# Altium PCB hades_flight_controller_pcb.PcbDoc (part 1 of 2)
Units mm, origin at the board's own origin, x right, y up, seen from the top; angles counter-clockwise.
Board outline 60 x 80 mm, 2 copper layers (Top Layer, Bottom Layer), stack 1.67 mm thick; 73 components, 57 nets, 348 pads, 115 vias.
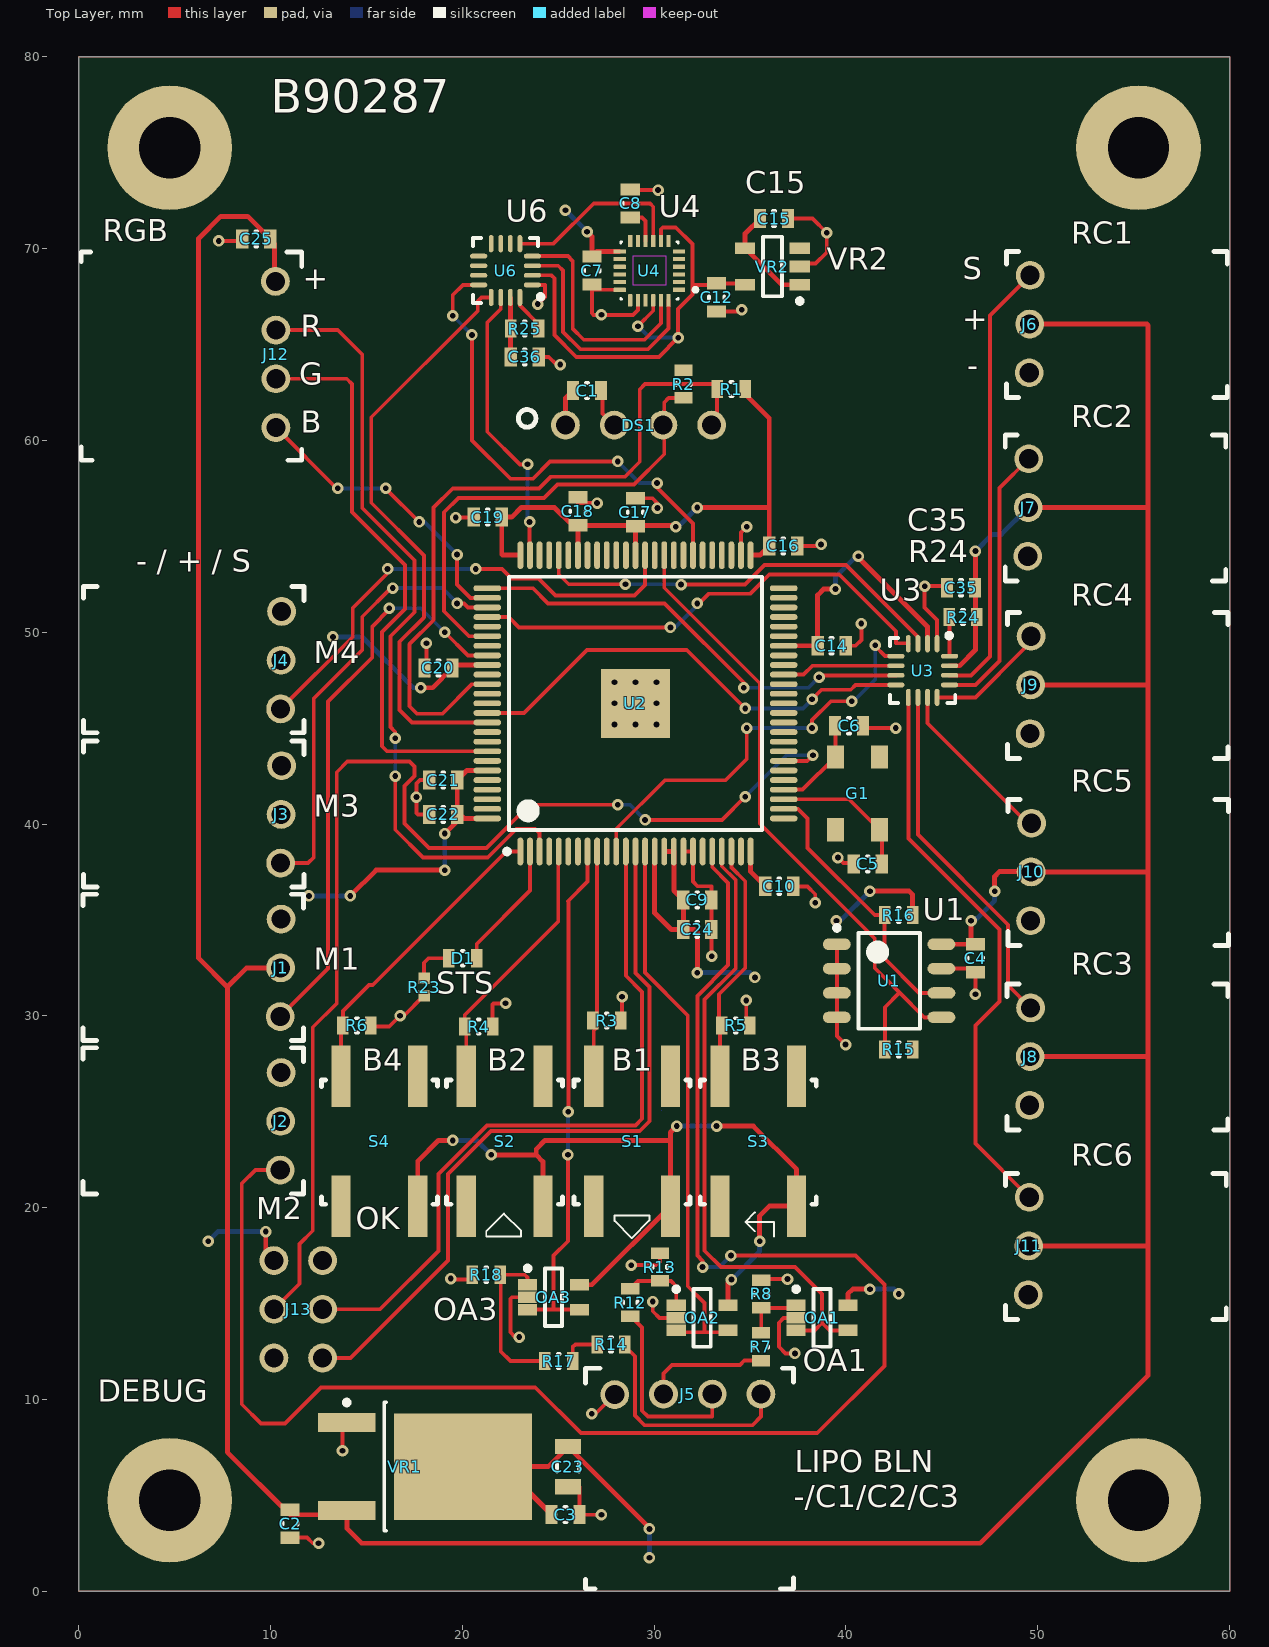
[diagram p0: Top Layer view]
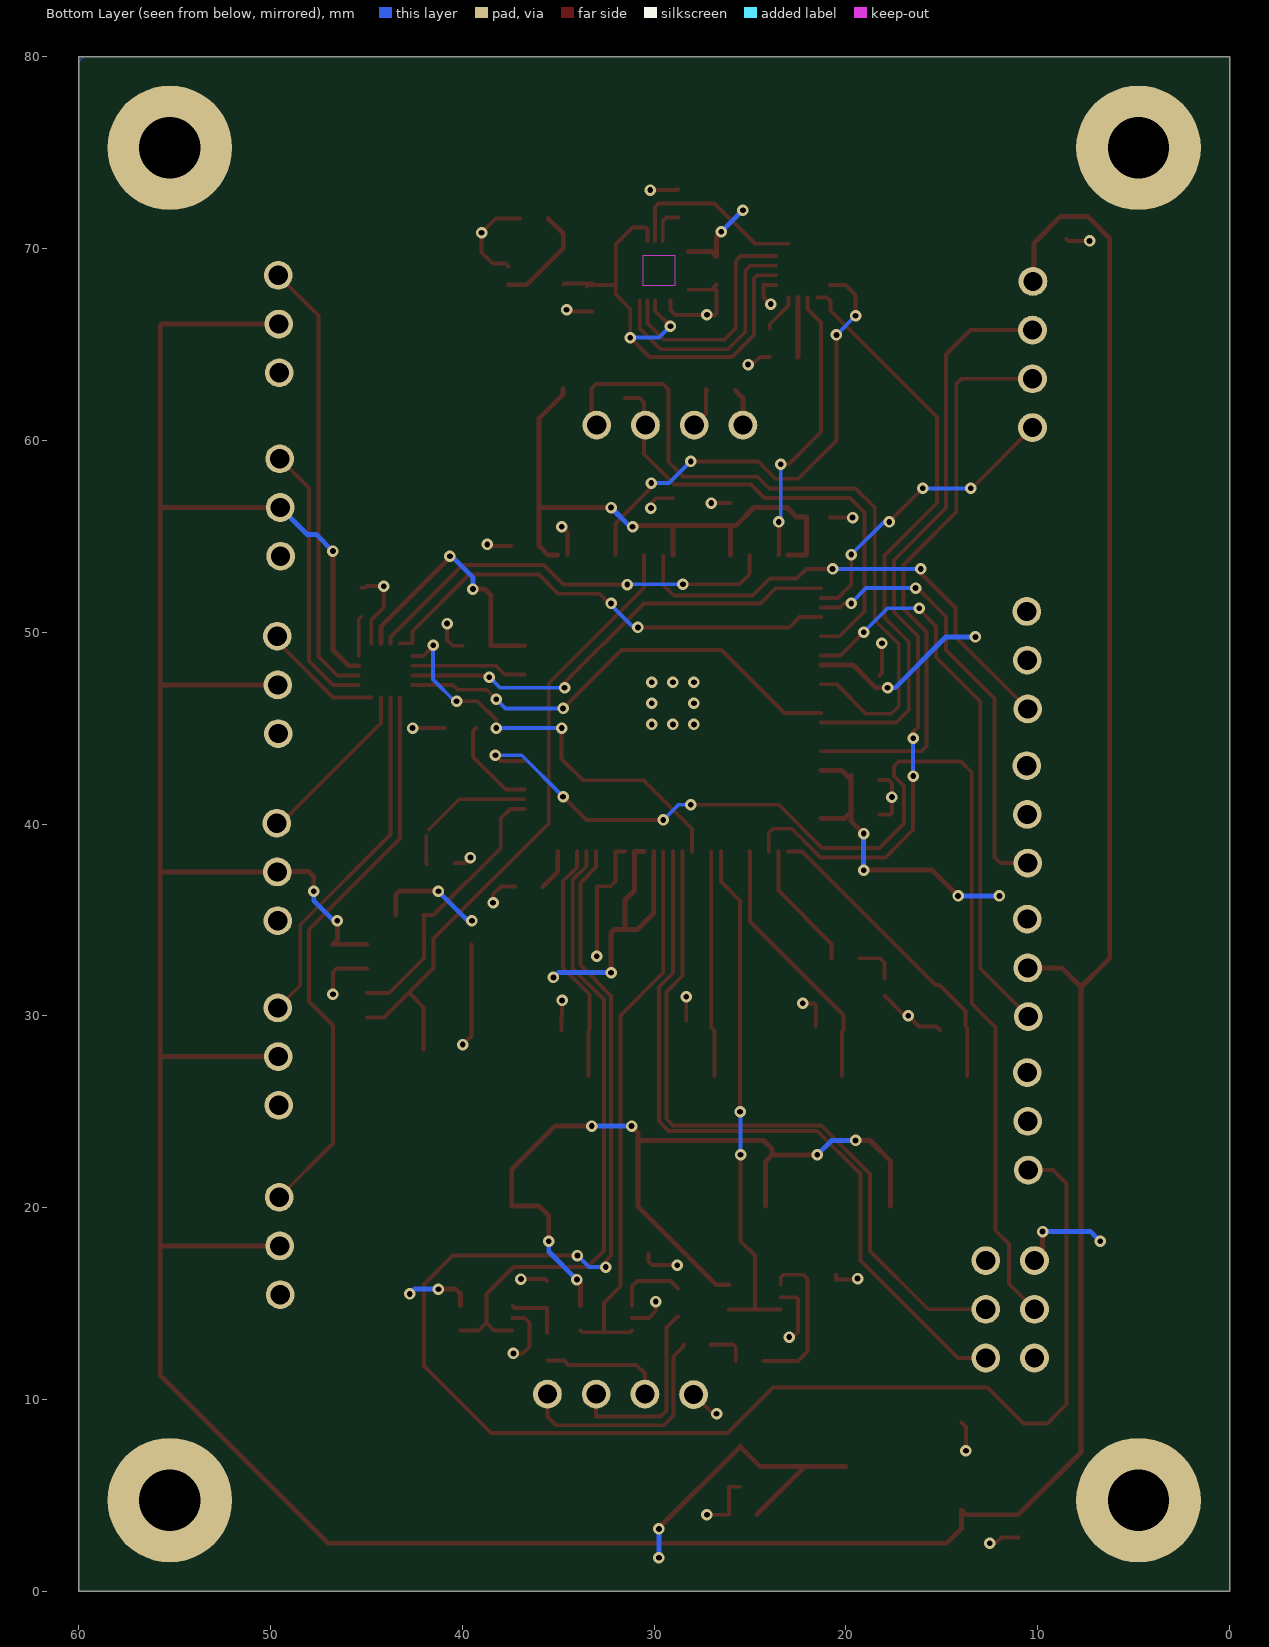
[diagram p1: Bottom Layer view, seen from below]

## Layer stack, top to bottom
Top Solder: solder mask 0.0102, Solder Resist, Dk 3.5
Top Layer: signal copper 0.053
Dielectric 1: dielectric 1.564, FR-4, Dk 4.8
Bottom Layer: signal copper 0.053
Bottom Solder: solder mask 0.0102, Solder Resist, Dk 3.5

## Board outline
0,80 0,0 60,0 60,80

## Design rules (kind name [scope] priority, off if disabled: settings)
AcuteAngle [All] p1: minimum=6.00000000000000E+0001 checktracksonly=FALSE
BoardOutlineClearance [All] p1: gap=0.254 ignorepadtopadclearanceinfootprint=FALSE except(0: Arc-SplitContinuation Track-SplitContinuation SMDPad-SplitContinuation THPad-SplitContinuation Via-SplitContinuation Fill-SplitContinuation Poly-SplitContinuation Region-SplitContinuation Text-SplitContinuation; 0.2: Arc-OutlineEdge Track-OutlineEdge SMDPad-OutlineEdge THPad-OutlineEdge Via-OutlineEdge Fill-OutlineEdge Poly-OutlineEdge Region-OutlineEdge)
Clearance [All] p1: gap=0.2 ignorepadtopadclearanceinfootprint=TRUE
MinimumSolderMaskSliver [All] p1: minsoldermaskwidth=0.12
PolygonConnect [All] p1: connectstyle=Relief reliefconductorwidth=0.254 reliefentries=4 polygonreliefangle="90 Angle" airgapwidth=0.254
RoomDefinition nelikkopteri_lennukontroller_riistvaraprojekt_sygis [InComponentClass('nelikkopteri_lennukontroller_riistvaraprojekt_sygis')] p1 off: confinementstyle=ConfineIn formatcopy=TRUE lockcomponents=FALSE outline 273,120.575 324.5,120.575 324.5,132 273,132
RoutingVias [All] p1: holewidth=0.3 width=0.6 viastyle="Through Hole" minholewidth=0.3 minwidth=0.6 maxholewidth=0.3 maxwidth=0.6
SolderMaskExpansion [All] p1: expansion=0.05
Width [All] p1: maxlimit=0.254 minlimit=0.2 preferedwidth=0.2
29 further rules are at their usual default settings.

## Components (designator, comment, footprint, x,y, rotation, side; value= is the part's Value field where it differs from the comment)
C1 "1uF" "0603 - cap" 26.5,62.6 r0 top
C2 "1uF" "0603 - cap" 11.015,3.525 r270 top
C3 "1uF" "0603 - cap" 25.375,4 r0 top
C4 "0.1uF" "0603 - cap" 46.75,33 r270 top
C5 "22pF" "0603 - cap" 41.13,37.92 r0 top
C6 "22pF" "0603 - cap" 40.16,45.12 r180 top
C7 "0.1uF" "0603 - cap" 26.75,68.855 r270 top
C8 "0.1uF" "0603 - cap" 28.75,72.355 r90 top
C9 "0.1uF" "0603 - cap" 32.25,36.04 r0 top
C10 "0.1uF" "0603 - cap" 36.52,36.75 r0 top
C12 "1uF" "0603 - cap" 33.25,67.455 r270 top
C14 "0.1uF" "0603 - cap" 39.25,49.29 r0 top
C15 "1uF" "0603 - cap" 36.25,71.565 r0 top
C16 "0.1uF" "0603 - cap" 36.73,54.5 r0 top
C17 "0.1uF" "0603 - cap" 29.025,56.25 r90 top
C18 "0.1uF" "0603 - cap" 26.025,56.3 r90 top
C19 "0.1uF" "0603 - cap" 21.325,56 r180 top
C20 "0.1uF" "0603 - cap" 18.75,48.14 r180 top
C21 "0.1uF" "0603 - cap" 19,42.29 r180 top
C22 "0.1uF" "0603 - cap" 19,40.5 r180 top
C23 "4.7uF" "0805 - cap" 25.5,6.5 r270 top
C24 "0.1uF" "0603 - cap" 32.25,34.5 r0 top
C25 "0.1uF" "0603 - cap" 9.25,70.5 r180 top
C35 "0.1uF" "0603 - cap" 46,52.315 r180 top
C36 "0.1uF" "0603 - cap" 23.25,64.355 r0 top
D1 "KP-1608QBC-D" "0603 - resistor" 20.025,33 r180 top
DS1 "MDOB048064AV-WI" oled-display 25.525,60.67 r0 top locked
G1 "LFXTAL055901" kristall 40.75,41.5 r270 top
J1 "292253-3 (motor)" "3-pin connector" 10.55,34.29 r270 top
J2 "292253-3 (motor)" "3-pin connector" 10.55,26.29 r270 top
J3 "292253-3 (motor)" "3-pin connector" 10.575,42.29 r270 top
J4 "292253-3 (motor)" "3-pin connector" 10.575,50.33 r270 top
J5 "292161-4 (balance)" "4-pin connector" 30.045,10.277 r0 top
J6 "292253-3 (RC)" "3-pin connector" 49.55,64.275 r90 top
J7 "292253-3 (RC)" "3-pin connector" 49.475,54.71 r90 top
J8 "292253-3 (RC)" "3-pin connector" 49.575,26.085 r90 top
J9 "292253-3 (RC)" "3-pin connector" 49.6,45.46 r90 top
J10 "292253-3 (RC)" "3-pin connector" 49.625,35.71 r90 top
J11 "292253-3 (RC)" "3-pin connector" 49.5,16.21 r90 top
J12 "292161-4 (led driver)" "4-pin connector" 10.277,66.19 r270 top
J13 "292161-4" "6-PIN CONNECTOR" 12.712,16.09 r270 top
OA1 "MIC920YC5-TR" (OPAMP)SOT65P280X110-5N 38.75,14.25 r0 top
OA2 "MIC920YC5-TR" (OPAMP)SOT65P280X110-5N 32.5,14.25 r0 top
OA3 "MIC920YC5-TR" (OPAMP)SOT65P280X110-5N 24.75,15.33 r0 top
R1 "2.2K" "0603 - resistor" 34.025,62.675 r180 top
R2 "2.2K" "0603 - resistor" 31.525,62.935 r270 top
R3 "1K" "0603 - resistor" 27.525,29.75 r0 top
R4 "1K" "0603 - resistor" 20.85,29.44 r0 top
R5 "1K" "0603 - resistor" 34.25,29.5 r0 top
R6 "1K" "0603 - resistor" 14.5,29.5 r0 top
R7 "100k" "0603 - resistor" 35.565,12.75 r90 top
R8 "100k" "0603 - resistor" 35.58,15.5 r90 top
R12 "200K" "0603 - resistor" 28.75,15.05 r270 top
R13 "100k" "0603 - resistor" 30.3,16.9 r90 top
R14 "200K" "0603 - resistor" 27.75,12.87 r0 top
R15 "2.2K" "0603 - resistor" 42.75,28.25 r180 top
R16 "2.2K" "0603 - resistor" 42.75,35.25 r180 top
R17 "200K" "0603 - resistor" 25.025,12 r0 top
R18 "100k" "0603 - resistor" 21.25,16.5 r180 top
R23 "50" "0402 - resistor" 18,31.5 r270 top
R24 "200K" "0603 - resistor" 46.1,50.79 r180 top
R25 "200K" "0603 - resistor" 23.25,65.83 r0 top
S1 "EVQ-Q2D03W" button 28.775,23.5 r90 top
S2 "EVQ-Q2D03W" button 22.125,23.5 r90 top
S3 "EVQ-Q2D03W" button 35.35,23.5 r90 top
S4 "EVQ-Q2D03W" button 15.6,23.5 r90 top
U1 "24C02C/SN" (EEPROM)SOIC127P600X175-8N 42.25,31.825 r0 top
U2 "LPC5512JBD100E" TSQFP50P1600X1600X160_HS-101N 29.025,46.29 r90 top
U3 "NVT2006BS,118" "QFN5(SHIFTER) 0P300X300X100_HS-17N" 44,48 r270 top
U4 "ICM-20948" QFN40P300X300X105-24N 29.75,68.85 r180 top
U6 "NVT2006BS,118" "QFN5(SHIFTER) 0P300X300X100_HS-17N" 22.25,68.855 r180 top
VR1 "TLV1117-33CKVURG3" DPAK229P991X252-3N 18.075,6.5 r0 top
VR2 "MCP1804T-1802I/OT" "(LDO 1.8)SOT95P270X145-5N" 36.165,69.065 r180 top

## Footprints (in the part's own frame and the unit in brackets; to place one, negate y for a bottom-side part, rotate by r counter-clockwise, add the part's x,y. Pads: shape width x height; smd on the part's side, far side on the other; paste and mask are expansions set on the pad)
"3-pin connector" [mm]
  round 1.5 hole 1: 1(-0.75,0) 2(1.79,-0.025) 3(4.33,-0.05)
  silkscreen extent -2.04,-10.33 5.58,1.17, body extent -1.9,-10.2 5.45,-1, height 3
"4-pin connector" [mm]
  round 1.5 hole 1: 1(-2.1,-0.025) 2(0.44,0) 3(2.98,0) 4(5.52,0)
  silkscreen extent -3.62,-10.15 7.22,1.35, body extent -3.47,-10.07 7.1,-0.87, height 3
"6-PIN CONNECTOR" [mm]
  round 1.5 hole 1: 1(-1.15,0) 2(1.39,0) 3(3.93,0) 4(-1.15,-2.54) 5(1.39,-2.54) 6(3.93,-2.54)
  body extent -2.45,-12.71 5.15,-3.74, height 1.27
"0402 - resistor" [mm] "Chip Resistor, 2-Leads, Body 1,00x0,50mm, IPC Medium Density"
  rect 0.6x0.6 smd mask+0.06: 1(-0.45,0) 2(0.45,0)
  body extent -0.55,-0.3 0.55,0.3, height 0.4
"0603 - cap" [mm] "Chip Capacitor, 2-Leads, Body 1,55x0,85mm, IPC Medium Density"
  rect 0.64x1 smd: 1(-0.73,0) 2(0.73,0)
  silkscreen extent -0.05,-0.4 0.05,0.4, body extent -0.83,-0.48 0.82,0.47, height 0.45
"0603 - resistor" [mm] "Chip Resistor, 2-Leads, Body 1,55x0,85mm, IPC Medium Density"
  rect 0.6x0.95 smd: 1(-0.725,0) 2(0.725,0)
  silkscreen extent -0.05,-0.38 0.05,0.38, body extent -0.82,-0.48 0.82,0.48, height 0.45
"0805 - cap" [mm] "Chip Capacitor, 2-Leads, Body 2,00x1,20mm, IPC Medium Density"
  rect 0.8x1.35 smd: 1(-1.05,0) 2(1.05,0)
  silkscreen extent -0.25,-0.58 0.25,0.58, body extent -1.05,-0.65 1.05,0.65, height 0.3
(EEPROM)SOIC127P600X175-8N [mm] "SOIC, 8-Leads, Body 4,90x3,90mm, Pitch 1,27mm, IPC Medium Density"
  oval 1.45x0.6 smd: 1(-2.725,1.905) 2(-2.725,0.635) 3(-2.725,-0.635) 4(-2.725,-1.905) 5(2.725,-1.905) 6(2.725,-0.635) 7(2.725,0.635) 8(2.725,1.905)
  silkscreen extent -2.85,-2.5 1.6,2.88, body extent -2,-2.5 2,2.5, height 1.75
"(LDO 1.8)SOT95P270X145-5N" [mm] "SOT23, 5-Leads, Body 2,90x2,70mm, Pitch 0,95mm, IPC Medium Density"
  rect 1.05x0.6 smd: 1(-1.425,0.95) 2(-1.425,0) 3(-1.425,-0.95) 4(1.425,-0.95) 5(1.425,0.95)
  silkscreen extent -1.55,-1.55 0.5,1.92, body extent -0.9,-1.55 0.9,1.55, height 1.45
(OPAMP)SOT65P280X110-5N [mm] "SOT23, 5-Leads, Body 2,90x2,80mm, Pitch 0,65mm, IPC Medium Density"
  rect 1x0.6 smd: 1(-1.35,0.65) 2(-1.35,0) 3(-1.35,-0.65) 4(1.35,-0.65) 5(1.35,0.65)
  silkscreen extent -1.47,-1.5 0.45,1.62, body extent -0.85,-1.5 0.85,1.5, height 1.1
button [mm]
  rect 3.2x1 smd: 1(-3.425,-2.075) 2(-3.425,1.925) 3(3.35,-2.075) 4(3.35,1.925)
  silkscreen extent -3.33,-3.1 3.15,2.95, body extent -3.4,-3.2 3.2,3.03, height 1.3
DPAK229P991X252-3N [mm] "D-PAK, 3-Pads, Body 6,20x6,71mm (max), IPC Medium Density"
  rect 3x1 smd: 1(-4.1,2.29) 3(-4.1,-2.29)
  rect 7.2x5.55 smd: 2(1.95,0)
  silkscreen extent -4.22,-3.35 -2.05,3.46, body extent -2.15,-3.35 4.05,3.35, height 2.52
kristall [mm]
  rect 1.2x0.9 smd: 1(-2,1) 2(1.8,-1.3) 3(-2,-1.3) 4(1.8,1)
  body extent -2.7,-1.85 2.5,1.55, height 0.45
oled-display [mm]
  round 1.5 hole 1: 1(-0.15,0.125) 2(2.39,0.125) 3(4.93,0.125) 4(7.47,0.125)
  silkscreen extent -2.61,0.02 -0.15,0.93, body extent -4.23,-25.3 11.48,-1.05, height 3.5
"QFN5(SHIFTER) 0P300X300X100_HS-17N" [mm] "QFN, 16-Leads, Body 3,00x3,00mm, Pitch 0,50mm, Thermal Pad 1,50x1,50mm, IPC Medium Density"
  oval 0.9x0.25 smd mask+0.13: 1(-1.4,0.75) 2(-1.4,0.25) 3(-1.4,-0.25) 4(-1.4,-0.75) 9(1.4,-0.75) 10(1.4,-0.25) 11(1.4,0.25) 12(1.4,0.75)
  oval 0.25x0.9 smd mask+0.13: 5(-0.75,-1.4) 6(-0.25,-1.4) 7(0.25,-1.4) 8(0.75,-1.4) 13(0.75,1.4) 14(0.25,1.4) 15(-0.25,1.4) 16(-0.75,1.4)
  silkscreen extent -1.95,-1.7 1.7,1.7, body extent -1.55,-1.55 1.55,1.55, height 1
QFN40P300X300X105-24N [mm]
  rrect25% 0.64x0.22 smd: 1(-1.545,1) 2(-1.545,0.6) 3(-1.545,0.2) 4(-1.545,-0.2) 5(-1.545,-0.6) 6(-1.545,-1) 13(1.545,-1) 14(1.545,-0.6) 15(1.545,-0.2) 16(1.545,0.2) 17(1.545,0.6) 18(1.545,1)
  rrect25% 0.22x0.64 smd: 7(-1,-1.545) 8(-0.6,-1.545) 9(-0.2,-1.545) 10(0.2,-1.545) 11(0.6,-1.545) 12(1,-1.545) 19(1,1.545) 20(0.6,1.545) 21(0.2,1.545) 22(-0.2,1.545) 23(-0.6,1.545) 24(-1,1.545)
  Keep-Out Layer region: 0.85,-0.77 -0.85,-0.77 -0.85,0.77 0.85,0.77
  Keep-Out Layer region: 0.85,-0.77 -0.85,-0.77 -0.85,0.77 0.85,0.77
  silkscreen extent -2.5,-1.5 1.5,1.5, body extent -1.5,-1.5 1.5,1.5, height 1
TSQFP50P1600X1600X160_HS-101N [mm] "TSQFP, 100-Leads, Body 14,00x14,00mm, Pitch 0,50mm, Thermal Pad 3,61x3,61mm, IPC Medium Density"
  oval 1.45x0.3 smd: 1(-7.725,6) 2(-7.725,5.5) 3(-7.725,5) 4(-7.725,4.5) 5(-7.725,4) 6(-7.725,3.5) 7(-7.725,3) 8(-7.725,2.5) 9(-7.725,2) 10(-7.725,1.5) 11(-7.725,1) 12(-7.725,0.5) 13(-7.725,0) 14(-7.725,-0.5) 15(-7.725,-1) 16(-7.725,-1.5) 17(-7.725,-2) 18(-7.725,-2.5) 19(-7.725,-3) 20(-7.725,-3.5) 21(-7.725,-4) 22(-7.725,-4.5) 23(-7.725,-5) 24(-7.725,-5.5) 25(-7.725,-6) 51(7.725,-6) 52(7.725,-5.5) 53(7.725,-5) 54(7.725,-4.5) 55(7.725,-4) 56(7.725,-3.5) 57(7.725,-3) 58(7.725,-2.5) 59(7.725,-2) 60(7.725,-1.5) 61(7.725,-1) 62(7.725,-0.5) 63(7.725,0) 64(7.725,0.5) 65(7.725,1) 66(7.725,1.5) 67(7.725,2) 68(7.725,2.5) 69(7.725,3) 70(7.725,3.5) 71(7.725,4) 72(7.725,4.5) 73(7.725,5) 74(7.725,5.5) 75(7.725,6)
  oval 0.3x1.45 smd: 26(-6,-7.725) 27(-5.5,-7.725) 28(-5,-7.725) 29(-4.5,-7.725) 30(-4,-7.725) 31(-3.5,-7.725) 32(-3,-7.725) 33(-2.5,-7.725) 34(-2,-7.725) 35(-1.5,-7.725) 36(-1,-7.725) 37(-0.5,-7.725) 38(0,-7.725) 39(0.5,-7.725) 40(1,-7.725) 41(1.5,-7.725) 42(2,-7.725) 43(2.5,-7.725) 44(3,-7.725) 45(3.5,-7.725) 46(4,-7.725) 47(4.5,-7.725) 48(5,-7.725) 49(5.5,-7.725) 50(6,-7.725) 76(6,7.725) 77(5.5,7.725) 78(5,7.725) 79(4.5,7.725) 80(4,7.725) 81(3.5,7.725) 82(3,7.725) 83(2.5,7.725) 84(2,7.725) 85(1.5,7.725) 86(1,7.725) 87(0.5,7.725) 88(0,7.725) 89(-0.5,7.725) 90(-1,7.725) 91(-1.5,7.725) 92(-2,7.725) 93(-2.5,7.725) 94(-3,7.725) 95(-3.5,7.725) 96(-4,7.725) 97(-4.5,7.725) 98(-5,7.725) 99(-5.5,7.725) 100(-6,7.725)
  rect 3.6x3.6 smd: 52(0,0)
  silkscreen extent -7.85,-6.6 6.6,6.82, body extent -7,-7 7,7, height 1.6

## Part data
C1 C2 C3 C12 C15: library part "1uF cap", "Multilayer Ceramic Capacitors MLCC - SMD/SMT 0402 1.0uF 6.3volts *Derate Voltage/Temp", Case/Package=0402, Case Code (Metric)=1005, Dielectric=X7R, Manufacturer=Murata, Manufacturer Part Number=GRM155R70J105KA12D, Max Operating Temperature=125°C, Min Operating Temperature=-55°C, Package Quantity=10000, Supplier Part Number 1=2346895, Tolerance=10%, Voltage Rating=6.3V, Capacitance=1uF, Case Code (Imperial)=0402, ComponentLink1Description=http://www.farnell.com/datasheets/2189111.pdf?src-supplier=Newark, ComponentLink1URL=http://www.farnell.com/datasheets/2189111.pdf?src-supplier=Newark, ComponentLink2Description=http://www.farnell.com/datasheets/2189111.pdf?src-supplier=Farnell, ComponentLink2URL=http://www.farnell.com/datasheets/2189111.pdf?src-supplier=Farnell, ComponentLink3Description=https://search.murata.co.jp/Ceramy/image/img/A01X/G101/ENG/GRM155R70J105KA12-01.pdf?src-supplier=Digi-Key, ComponentLink3URL=https://search.murata.co.jp/Ceramy/image/img/A01X/G101/ENG/GRM155R70J105KA12-01.pdf?src-supplier=Digi-Key, ComponentLink4Description=http://www.mouser.com/ds/2/281/c02e-2905.pdf?src-supplier=Mouser, ComponentLink4URL=http://www.mouser.com/ds/2/281/c02e-2905.pdf?src-supplier=Mouser, ComponentLink5Description=http://psearch.en.murata.com/capacitor/product/GRM155R70J105KA12%23.pdf?src-supplier=Avnet, ComponentLink5URL=http://psearch.en.murata.com/capacitor/product/GRM155R70J105KA12%23.pdf?src-supplier=Avnet, ComponentLink6Description=http://components.arrow.com/part/dataview/0323_06434986?src-supplier=Arrow+Europe, ComponentLink6URL=http://components.arrow.com/part/dataview/0323_06434986?src-supplier=Arrow+Europe, Depth=0.5mm, Height=0.5mm, Lead Free="Lead Free", Length=1mm, Material=Ceramic, Mount="Surface Mount", Packaging="Tape and Reel", RoHS Compliant=Yes, Supplier 1=Farnell, Termination=SMD/SMT, Thickness=0.022inch, Voltage Rating (DC)=6.3V, Weight=0.000212oz, Width=0.5mm
C4 C7 C8 C9 C10 C14 C16 C17 C18 C19 C20 C21 C22 C24 C25 C35 C36: library part "0.1uF cap", "Cap, 0.1?F, 10V, 10%, X7R, 0603, Reel", Capacitance=100nF, Case Code (Imperial)=0603, Case Code (Metric)=1608, Dielectric=X7R, Manufacturer=Multicomp, Manufacturer Part Number=MC0603B104K100CT, Max Operating Temperature=125°C, Min Operating Temperature=-55°C, Supplier Part Number 1=1856307, Tolerance=10%, Voltage Rating=10V, ComponentLink1Description=http://www.farnell.com/datasheets/2117900.pdf?src-supplier=Element14, ComponentLink1URL=http://www.farnell.com/datasheets/2117900.pdf?src-supplier=Element14, ComponentLink2Description=http://www.farnell.com/datasheets/2117933.pdf?src-supplier=Farnell, ComponentLink2URL=http://www.farnell.com/datasheets/2117933.pdf?src-supplier=Farnell, ComponentLink3Description=http://www.farnell.com/datasheets/2117933.pdf?src-supplier=Element14, ComponentLink3URL=http://www.farnell.com/datasheets/2117933.pdf?src-supplier=Element14, Packaging="Cut Tape", REACH SVHC="No SVHC", Supplier 1=Farnell, Voltage Rating (DC)=10V
C5 C6: library part "22pF cap", "0402 22 pF 50 V ±5 % Tolerance C0G SMT Multilayer Ceramic Capacitor", Case/Package=0402, Case Code (Metric)=1005, Dielectric=C0G, Manufacturer=Murata, Manufacturer Part Number=GCM1555C1H220JA16D, Max Operating Temperature=125°C, Min Operating Temperature=-55°C, Package Quantity=1, Ratings=AEC-Q200, Supplier Part Number 1=2781410, Tolerance=5%, Voltage Rating=50V, Capacitance=22pF, Case Code (Imperial)=0402, ComponentLink1Description=http://www.farnell.com/datasheets/2189077.pdf?src-supplier=Farnell, ComponentLink1URL=http://www.farnell.com/datasheets/2189077.pdf?src-supplier=Farnell, ComponentLink2Description=http://www.farnell.com/datasheets/2189077.pdf?src-supplier=Element14, ComponentLink2URL=http://www.farnell.com/datasheets/2189077.pdf?src-supplier=Element14, ComponentLink3Description=http://search.murata.co.jp/Ceramy/image/img/A01X/partnumbering_e_02.pdf?src-supplier=Digi-Key, ComponentLink3URL=http://search.murata.co.jp/Ceramy/image/img/A01X/partnumbering_e_02.pdf?src-supplier=Digi-Key, ComponentLink4Description=http://www.mouser.com/ds/2/281/c03e-806517.pdf?src-supplier=Mouser, ComponentLink4URL=http://www.mouser.com/ds/2/281/c03e-806517.pdf?src-supplier=Mouser, ComponentLink5Description=http://psearch.en.murata.com/capacitor/product/GCM1555C1H220JA16%23.pdf?src-supplier=Avnet, ComponentLink5URL=http://psearch.en.murata.com/capacitor/product/GCM1555C1H220JA16%23.pdf?src-supplier=Avnet, ComponentLink6Description=http://components.arrow.com/part/dataview/0323_07199610?src-supplier=Arrow+Europe, ComponentLink6URL=http://components.arrow.com/part/dataview/0323_07199610?src-supplier=Arrow+Europe, Depth=0.5mm, Height=0.5mm, Lead Free="Lead Free", Length=1mm, Mount="Surface Mount", Packaging="Tape and Reel", RoHS Compliant=Yes, Supplier 1=Farnell, Termination=SMD/SMT, Thickness=0.022inch, Voltage Rating (DC)=50V, Weight=0.000212oz, Width=0.5mm
C23: library part "4.7uF cap", "0805 4.7 uF 50 V ±10% Tolerance X5R SMT Multilayer Ceramic Chip Capacitor", Case/Package=0805, Case Code (Metric)=2012, Dielectric=X5R, Manufacturer=Murata, Manufacturer Part Number=GRT21BR61H475KE13L, Max Operating Temperature=85°C, Min Operating Temperature=-55°C, Ratings=AEC-Q200, Supplier Part Number 1=2672194, Tolerance=10%, Voltage Rating=50V, Capacitance=4.7uF, Case Code (Imperial)=0805, ComponentLink1Description=http://www.farnell.com/datasheets/2165993.pdf?src-supplier=Farnell, ComponentLink1URL=http://www.farnell.com/datasheets/2165993.pdf?src-supplier=Farnell, ComponentLink2Description=http://www.farnell.com/datasheets/2165993.pdf?src-supplier=Element14, ComponentLink2URL=http://www.farnell.com/datasheets/2165993.pdf?src-supplier=Element14, ComponentLink3Description=http://search.murata.co.jp/Ceramy/image/img/A01X/G101/ENG/GRT21BR61H475KE13-01.pdf?src-supplier=Digi-Key, ComponentLink3URL=http://search.murata.co.jp/Ceramy/image/img/A01X/G101/ENG/GRT21BR61H475KE13-01.pdf?src-supplier=Digi-Key, Length=0.079inch, Mount="Surface Mount", Packaging="Tape and Reel", Pricing 1="5=0.38, 50=0.194, 250=0.174, 500=0.154, 1500=0.128, 3000=0.1, 15000=0.098 (EUR)", RoHS Compliant=Yes, Stock 1=51693, Supplier 1=Farnell, Thickness=0.057inch, Voltage Rating (DC)=50V, Width=0.049inch
D1: "LED Uni-Color Blue 468nm 2-Pin Chip LED T/R", Case/Package=1608, Color=Blue, Forward Current=20mA, Forward Voltage=3.3V, Lens Color=Clear, Manufacturer=Kingbright, Supplier Part Number 1=2449779, ComponentLink1Description=http://www.farnell.com/datasheets/2045913.pdf?src-supplier=Element14, ComponentLink1URL=http://www.farnell.com/datasheets/2045913.pdf?src-supplier=Element14, ComponentLink2Description=http://www.produktinfo.conrad.com/datenblaetter/1000000-1099999/001050379-da-01-en-SMD_CHIPLED_BL_0603_KP_1608QBC_D.pdf?src-supplier=Conrad, ComponentLink2URL=http://www.produktinfo.conrad.com/datenblaetter/1000000-1099999/001050379-da-01-en-SMD_CHIPLED_BL_0603_KP_1608QBC_D.pdf?src-supplier=Conrad, Dominant Wavelength=470nm, Height=1.1mm, Length=0.8mm, Lens Style=Diffused,Colorless,Circular,Rectangular, Luminous Intensity=100mcd, Manufacturer Part Number=KP-1608QBC-D, Mount="Surface Mount", Number of LEDs=1, Number of Pins=2, Packaging="Tape and Reel", Pricing 1="2000=0.1 (EUR)", Radiation Hardening=No, REACH SVHC="No SVHC", RoHS Compliant=No, Series=KP, Stock 1=2000, Supplier 1=Farnell, Viewing Angle=120°, Wavelength=465nm, Width=1.6mm
DS1: "Oled Graphic Display, Cob, 48 X 64PIXELS", Manufacturer=Midas, Supplier Part Number 1=3154938, Manufacturer Part Number=MDOB048064AV-WI, Pricing 1="1=6.97, 5=6.06, 10=5.81, 50=4.98 (EUR)", Stock 1=48, Supplier 1=Farnell
G1: "Crystal, 8MHZ, 18PF, 5MM X 3.2MM", Manufacturer=IQD, Supplier Part Number 1=2832062, Manufacturer Part Number=LFXTAL055901, Pricing 1="1=0.729, 50=0.517, 100=0.457, 250=0.43, 500=0.404, 1000=0.377, 5000=0.35 (EUR)", Stock 1=2188, Supplier 1=Farnell
J1 J2 J3 J4: "Headers & Wire Housings 3P R/A HDR ASSY", Color=Natural, Contact Current Rating=4A, Contact Resistance=20mR, Current Rating=2A, Flammability Rating="UL94 V-0", Manufacturer="TE Connectivity", Manufacturer Part Number=292253-3, Max Operating Temperature=105°C, Max Voltage Rating (AC)=125V, Min Operating Temperature=-40°C, Package Quantity=500, Supplier Part Number 1=1675774, Approvals=UL, Backwall/Post Interruptions="No (Without)", ComponentLink1Description=http://www.farnell.com/datasheets/1828722.pdf?src-supplier=Farnell, ComponentLink1URL=http://www.farnell.com/datasheets/1828722.pdf?src-supplier=Farnell, ComponentLink2Description=http://www.te.com/commerce/DocumentDelivery/DDEController?Action=showdoc&DocId=Data+Sheet%7F1-1773455-8_CT_CONNECTOR_SERIES_QRG%7F0909%7Fpdf%7FEnglish%7FENG_DS_1-1773455-8_CT_CONNECTOR_SERIES_QRG_0909.pdf&src-supplier=Avnet+Europe, ComponentLink2URL=http://www.te.com/commerce/DocumentDelivery/DDEController?Action=showdoc&DocId=Data+Sheet%7F1-1773455-8_CT_CONNECTOR_SERIES_QRG%7F0909%7Fpdf%7FEnglish%7FENG_DS_1-1773455-8_CT_CONNECTOR_SERIES_QRG_0909.pdf&src-supplier=Avnet+Europe, ComponentLink3Description=http://www.te.com/commerce/DocumentDelivery/DDEController?Action=showdoc&DocId=Data+Sheet%7F1-1773455-8_CT_CONNECTOR_SERIES_QRG%7F0909%7Fpdf%7FEnglish%7FENG_DS_1-1773455-8_CT_CONNECTOR_SERIES_QRG_0909.pdf&src-supplier=Avnet+Asia, ComponentLink3URL=http://www.te.com/commerce/DocumentDelivery/DDEController?Action=showdoc&DocId=Data+Sheet%7F1-1773455-8_CT_CONNECTOR_SERIES_QRG%7F0909%7Fpdf%7FEnglish%7FENG_DS_1-1773455-8_CT_CONNECTOR_SERIES_QRG_0909.pdf&src-supplier=Avnet+Asia, ComponentLink4Description=http://www.onlinecomponents.com/productFiles/mf-AMP/basics292253-3_0.pdf?src-supplier=Onlinecomponents.com, ComponentLink4URL=http://www.onlinecomponents.com/productFiles/mf-AMP/basics292253-3_0.pdf?src-supplier=Onlinecomponents.com, ComponentLink5Description=https://www.alliedelec.com/m/d/b828f7336fbcfaaba46c8aec8fa2474c.pdf?src-supplier=Allied+Electronics, ComponentLink5URL=https://www.alliedelec.com/m/d/b828f7336fbcfaaba46c8aec8fa2474c.pdf?src-supplier=Allied+Electronics, ComponentLink6Description=https://www.te.com/commerce/DocumentDelivery/DDEController?Action=srchrtrv&DocNm=292253&DocType=Customer+Drawing&DocLang=English&src-supplier=Digi-Key, ComponentLink6URL=https://www.te.com/commerce/DocumentDelivery/DDEController?Action=srchrtrv&DocNm=292253&DocType=Customer+Drawing&DocLang=English&src-supplier=Digi-Key, Connector System=Wire-to-Board, Connector Type=Header,Pin, Contact Gender=Male, Contact Material=Brass, Contact Mating Length=0.177inch, Contact Plating=Tin, Contact Retention="No (Without)", Contact Shape=Round, Contact Type="Male Pin", Depth=8.8mm, ELV=Compliant, Gender=Male, Height=8.8mm, Housing Color=Natural, Housing Material=Nylon, Lead Free="Lead Free", Length=7.8mm, Material=Nylon, Mating Alignment="Yes (With)", Mating Retention="No (Without)", Max Voltage Rating (DC)=125V, Mount="Through Hole", Number of Contacts=3, Number of Positions=3, Number of Rows=1, Orientation="Right Angle", Packaging=Bag, PCB Mount Alignment="No (Without)", PCB Mounting Orientation="Right Angle", PCB Mount Retention=With, PCB Thickness=0.8mm, Pitch=2mm, Radiation Hardening=No, REACH SVHC="No SVHC", RoHS Compliant=Yes, Sealable="No (Without)", Series="AMP CT", Shape=Rectangular, Supplier 1=Farnell, Tail Length=3.2mm, Termination=Solder, Voltage Rating=125V, Width=0.157inch, Wire/Cable Gauge=22AWG, Wire/Cable Type=Discrete
J5 J12: "CONN HEADER 4POS VERT 2MM T/H", Color=Natural, Contact Current Rating=4A, Contact Resistance=20mR, Flammability Rating="UL94 V-0", Manufacturer="TE Connectivity", Manufacturer Part Number=292161-4, Max Operating Temperature=105°C, Max Voltage Rating (AC)=125V, Min Operating Temperature=-40°C, Package Quantity=1000, Supplier Part Number 1=1282952, Approvals=UL, Backwall/Post Interruptions="No (Without)", Body Material=Nylon, Body Plating=Tin, ComponentLink1Description=http://www.farnell.com/datasheets/1631402.pdf?src-supplier=Element14, ComponentLink1URL=http://www.farnell.com/datasheets/1631402.pdf?src-supplier=Element14, ComponentLink2Description=https://www.distrelec.biz/Web/Downloads/_t/ds/292161_x_eng_tds.pdf?mime=application%2Fpdf&src-supplier=Distrelec, ComponentLink2URL=https://www.distrelec.biz/Web/Downloads/_t/ds/292161_x_eng_tds.pdf?mime=application%2Fpdf&src-supplier=Distrelec, ComponentLink3Description=http://www.jameco.com/Jameco/Products/ProdDS/1931034.pdf?src-supplier=Jameco, ComponentLink3URL=http://www.jameco.com/Jameco/Products/ProdDS/1931034.pdf?src-supplier=Jameco, ComponentLink4Description=http://www.te.com/commerce/DocumentDelivery/DDEController?Action=showdoc&DocId=Data+Sheet%7F1-1773455-8_CT_CONNECTOR_SERIES_QRG%7F0909%7Fpdf%7FEnglish%7FENG_DS_1-1773455-8_CT_CONNECTOR_SERIES_QRG_0909.pdf&src-supplier=Avnet, ComponentLink4URL=http://www.te.com/commerce/DocumentDelivery/DDEController?Action=showdoc&DocId=Data+Sheet%7F1-1773455-8_CT_CONNECTOR_SERIES_QRG%7F0909%7Fpdf%7FEnglish%7FENG_DS_1-1773455-8_CT_CONNECTOR_SERIES_QRG_0909.pdf&src-supplier=Avnet, ComponentLink5Description=http://www.te.com/commerce/DocumentDelivery/DDEController?Action=showdoc&DocId=Customer+Drawing%7F292161%7FP%7Fpdf%7FEnglish%7FENG_CD_292161_P.pdf%7F292161-4&src-supplier=Future+Electronics, ComponentLink5URL=http://www.te.com/commerce/DocumentDelivery/DDEController?Action=showdoc&DocId=Customer+Drawing%7F292161%7FP%7Fpdf%7FEnglish%7FENG_CD_292161_P.pdf%7F292161-4&src-supplier=Future+Electronics, ComponentLink6Description=http://www.te.com/commerce/DocumentDelivery/DDEController?Action=showdoc&DocId=Data+Sheet%7F1-1773455-8_CT_CONNECTOR_SERIES_QRG%7F0909%7Fpdf%7FEnglish%7FENG_DS_1-1773455-8_CT_CONNECTOR_SERIES_QRG_0909.pdf&src-supplier=Avnet+Europe, ComponentLink6URL=http://www.te.com/commerce/DocumentDelivery/DDEController?Action=showdoc&DocId=Data+Sheet%7F1-1773455-8_CT_CONNECTOR_SERIES_QRG%7F0909%7Fpdf%7FEnglish%7FENG_DS_1-1773455-8_CT_CONNECTOR_SERIES_QRG_0909.pdf&src-supplier=Avnet+Europe, ComponentLink7Description=http://www.te.com/commerce/DocumentDelivery/DDEController?Action=srchrtrv&DocNm=292161&DocType=Customer+Drawing&DocLang=English&src-supplier=Digi-Key, ComponentLink7URL=http://www.te.com/commerce/DocumentDelivery/DDEController?Action=srchrtrv&DocNm=292161&DocType=Customer+Drawing&DocLang=English&src-supplier=Digi-Key, Connector System=Wire-to-Board, Connector Type=Header,Pin, Contact Gender=Male, Contact Material=Brass, Contact Mating Length=0.177inch, Contact Plating=Tin, Contact Retention="Yes (With)", Contact Shape=Round, Contact Style=Straight, Contact Type="Male Pin", Current Rating=4A, Depth=3.6mm, ELV=Compliant, Gender=Male, Height=0.267inch, Housing Color=Natural, Housing Material=Nylon, Lead Free="Lead Free", Lead Pitch=2mm, Length=9.8mm, Material=Nylon, Mating Alignment="No (Without)", Mating Retention="No (Without)", Max Voltage Rating (DC)=125V, Mount="Through Hole", Number of Contacts=4, Number of Positions=4, Number of Rows=1, Orientation=Straight, Packaging=Bag, PCB Mount Alignment="No (Without)", PCB Mounting Orientation=Vertical, PCB Mount Retention=With, PCB Thickness=0.8mm, Pitch=2mm, Plating Thickness=2um, Pricing 1="10=0.346, 100=0.282, 500=0.256, 1000=0.211, 2500=0.192, 5000=0.185 (EUR)", Radiation Hardening=No, REACH SVHC="No SVHC", RoHS Compliant=Yes, Sealable="No (Without)", Series="AMP CT", Shape=Rectangular, Stock 1=3420, Strain Relief="No (Without)", Supplier 1=Farnell, Tail Length=3.2mm, Termination=Solder, Voltage Rating=125V, Voltage Rating (AC)=125V, Voltage Rating (DC)=125V, Width=3.6mm, Wire/Cable Gauge=22AWG, Wire/Cable Type=Discrete
J6 J7 J8 J9 J10 J11: "Post Header Assembly, 3 Position, Horizontal, 2mm Pitch, DIP Standard Type", Color=Natural, Contact Current Rating=4A, Contact Resistance=20mR, Current Rating=2A, Flammability Rating="UL94 V-0", Manufacturer="TE Connectivity", Manufacturer Part Number=292253-3, Max Operating Temperature=105°C, Max Voltage Rating (AC)=125V, Min Operating Temperature=-40°C, Package Quantity=500, Supplier Part Number 1=1675774, Approvals=UL, Backwall/Post Interruptions="No (Without)", ComponentLink1Description=http://www.farnell.com/datasheets/1828722.pdf?src-supplier=Farnell, ComponentLink1URL=http://www.farnell.com/datasheets/1828722.pdf?src-supplier=Farnell, ComponentLink2Description=http://www.te.com/commerce/DocumentDelivery/DDEController?Action=showdoc&DocId=Data+Sheet%7F1-1773455-8_CT_CONNECTOR_SERIES_QRG%7F0909%7Fpdf%7FEnglish%7FENG_DS_1-1773455-8_CT_CONNECTOR_SERIES_QRG_0909.pdf&src-supplier=Avnet+Europe, ComponentLink2URL=http://www.te.com/commerce/DocumentDelivery/DDEController?Action=showdoc&DocId=Data+Sheet%7F1-1773455-8_CT_CONNECTOR_SERIES_QRG%7F0909%7Fpdf%7FEnglish%7FENG_DS_1-1773455-8_CT_CONNECTOR_SERIES_QRG_0909.pdf&src-supplier=Avnet+Europe, ComponentLink3Description=http://www.te.com/commerce/DocumentDelivery/DDEController?Action=showdoc&DocId=Data+Sheet%7F1-1773455-8_CT_CONNECTOR_SERIES_QRG%7F0909%7Fpdf%7FEnglish%7FENG_DS_1-1773455-8_CT_CONNECTOR_SERIES_QRG_0909.pdf&src-supplier=Avnet+Asia, ComponentLink3URL=http://www.te.com/commerce/DocumentDelivery/DDEController?Action=showdoc&DocId=Data+Sheet%7F1-1773455-8_CT_CONNECTOR_SERIES_QRG%7F0909%7Fpdf%7FEnglish%7FENG_DS_1-1773455-8_CT_CONNECTOR_SERIES_QRG_0909.pdf&src-supplier=Avnet+Asia, ComponentLink4Description=http://www.onlinecomponents.com/productFiles/mf-AMP/basics292253-3_0.pdf?src-supplier=Onlinecomponents.com, ComponentLink4URL=http://www.onlinecomponents.com/productFiles/mf-AMP/basics292253-3_0.pdf?src-supplier=Onlinecomponents.com, ComponentLink5Description=https://www.alliedelec.com/m/d/b828f7336fbcfaaba46c8aec8fa2474c.pdf?src-supplier=Allied+Electronics, ComponentLink5URL=https://www.alliedelec.com/m/d/b828f7336fbcfaaba46c8aec8fa2474c.pdf?src-supplier=Allied+Electronics, ComponentLink6Description=https://www.te.com/commerce/DocumentDelivery/DDEController?Action=srchrtrv&DocNm=292253&DocType=Customer+Drawing&DocLang=English&src-supplier=Digi-Key, ComponentLink6URL=https://www.te.com/commerce/DocumentDelivery/DDEController?Action=srchrtrv&DocNm=292253&DocType=Customer+Drawing&DocLang=English&src-supplier=Digi-Key, Connector System=Wire-to-Board, Connector Type=Header,Pin, Contact Gender=Male, Contact Material=Brass, Contact Mating Length=0.177inch, Contact Plating=Tin, Contact Retention="No (Without)", Contact Shape=Round, Contact Type="Male Pin", Depth=8.8mm, ELV=Compliant, Gender=Male, Height=8.8mm, Housing Color=Natural, Housing Material=Nylon, Lead Free="Lead Free", Length=7.8mm, Material=Nylon, Mating Alignment="Yes (With)", Mating Retention="No (Without)", Max Voltage Rating (DC)=125V, Mount="Through Hole", Number of Contacts=3, Number of Positions=3, Number of Rows=1, Orientation="Right Angle", Packaging=Bag, PCB Mount Alignment="No (Without)", PCB Mounting Orientation="Right Angle", PCB Mount Retention=With, PCB Thickness=0.8mm, Pitch=2mm, Radiation Hardening=No, REACH SVHC="No SVHC", RoHS Compliant=Yes, Sealable="No (Without)", Series="AMP CT", Shape=Rectangular, Supplier 1=Farnell, Tail Length=3.2mm, Termination=Solder, Voltage Rating=125V, Width=0.157inch, Wire/Cable Gauge=22AWG, Wire/Cable Type=Discrete
J13: "CONN HEADER 4POS VERT 2MM T/H", Color=Natural, Contact Current Rating=4A, Contact Resistance=20mR, Flammability Rating="UL94 V-0", Manufacturer="TE Connectivity", Max Operating Temperature=105°C, Max Voltage Rating (AC)=125V, Min Operating Temperature=-40°C, Package Quantity=1000, Supplier Part Number 1=1206005, Approvals=UL, Backwall/Post Interruptions="No (Without)", Body Material=Nylon, Body Plating=Tin, ComponentLink1Description=http://www.farnell.com/datasheets/1631402.pdf?src-supplier=Element14, ComponentLink1URL=http://www.farnell.com/datasheets/1631402.pdf?src-supplier=Element14, ComponentLink2Description=https://www.distrelec.biz/Web/Downloads/_t/ds/292161_x_eng_tds.pdf?mime=application%2Fpdf&src-supplier=Distrelec, ComponentLink2URL=https://www.distrelec.biz/Web/Downloads/_t/ds/292161_x_eng_tds.pdf?mime=application%2Fpdf&src-supplier=Distrelec, ComponentLink3Description=http://www.jameco.com/Jameco/Products/ProdDS/1931034.pdf?src-supplier=Jameco, ComponentLink3URL=http://www.jameco.com/Jameco/Products/ProdDS/1931034.pdf?src-supplier=Jameco, ComponentLink4Description=http://www.te.com/commerce/DocumentDelivery/DDEController?Action=showdoc&DocId=Data+Sheet%7F1-1773455-8_CT_CONNECTOR_SERIES_QRG%7F0909%7Fpdf%7FEnglish%7FENG_DS_1-1773455-8_CT_CONNECTOR_SERIES_QRG_0909.pdf&src-supplier=Avnet, ComponentLink4URL=http://www.te.com/commerce/DocumentDelivery/DDEController?Action=showdoc&DocId=Data+Sheet%7F1-1773455-8_CT_CONNECTOR_SERIES_QRG%7F0909%7Fpdf%7FEnglish%7FENG_DS_1-1773455-8_CT_CONNECTOR_SERIES_QRG_0909.pdf&src-supplier=Avnet, ComponentLink5Description=http://www.te.com/commerce/DocumentDelivery/DDEController?Action=showdoc&DocId=Customer+Drawing%7F292161%7FP%7Fpdf%7FEnglish%7FENG_CD_292161_P.pdf%7F292161-4&src-supplier=Future+Electronics, ComponentLink5URL=http://www.te.com/commerce/DocumentDelivery/DDEController?Action=showdoc&DocId=Customer+Drawing%7F292161%7FP%7Fpdf%7FEnglish%7FENG_CD_292161_P.pdf%7F292161-4&src-supplier=Future+Electronics, ComponentLink6Description=http://www.te.com/commerce/DocumentDelivery/DDEController?Action=showdoc&DocId=Data+Sheet%7F1-1773455-8_CT_CONNECTOR_SERIES_QRG%7F0909%7Fpdf%7FEnglish%7FENG_DS_1-1773455-8_CT_CONNECTOR_SERIES_QRG_0909.pdf&src-supplier=Avnet+Europe, ComponentLink6URL=http://www.te.com/commerce/DocumentDelivery/DDEController?Action=showdoc&DocId=Data+Sheet%7F1-1773455-8_CT_CONNECTOR_SERIES_QRG%7F0909%7Fpdf%7FEnglish%7FENG_DS_1-1773455-8_CT_CONNECTOR_SERIES_QRG_0909.pdf&src-supplier=Avnet+Europe, ComponentLink7Description=http://www.te.com/commerce/DocumentDelivery/DDEController?Action=srchrtrv&DocNm=292161&DocType=Customer+Drawing&DocLang=English&src-supplier=Digi-Key, ComponentLink7URL=http://www.te.com/commerce/DocumentDelivery/DDEController?Action=srchrtrv&DocNm=292161&DocType=Customer+Drawing&DocLang=English&src-supplier=Digi-Key, Connector System=Wire-to-Board, Connector Type=Header,Pin, Contact Gender=Male, Contact Material=Brass, Contact Mating Length=0.177inch, Contact Plating=Tin, Contact Retention="Yes (With)", Contact Shape=Round, Contact Style=Straight, Contact Type="Male Pin", Current Rating=4A, Depth=3.6mm, ELV=Compliant, Gender=Male, Height=0.267inch, Housing Color=Natural, Housing Material=Nylon, Lead Free="Lead Free", Lead Pitch=2mm, Length=9.8mm, Manufacturer Part Number=292161-4, Material=Nylon, Mating Alignment="No (Without)", Mating Retention="No (Without)", Max Voltage Rating (DC)=125V, Mount="Through Hole", Number of Contacts=4, Number of Positions=4, Number of Rows=1, Orientation=Straight, Packaging=Bag, PCB Mount Alignment="No (Without)", PCB Mounting Orientation=Vertical, PCB Mount Retention=With, PCB Thickness=0.8mm, Pitch=2mm, Plating Thickness=2um, Radiation Hardening=No, REACH SVHC="No SVHC", RoHS Compliant=Yes, Sealable="No (Without)", Series="AMP CT", Shape=Rectangular, Strain Relief="No (Without)", Supplier 1=Farnell, Tail Length=3.2mm, Termination=Solder, Voltage Rating=125V, Voltage Rating (AC)=125V, Voltage Rating (DC)=125V, Width=3.6mm, Wire/Cable Gauge=22AWG, Wire/Cable Type=Discrete
OA1 OA2 OA3: "MIC920 Series 80 MHz 3000 v/us 9 V High-Speed Operational Amplifier - SOT-23-5", Input Bias Current=230nA, Input Offset Voltage (Vos)=300uV, Manufacturer=Microchip, Max Operating Temperature=85°C, Max Supply Voltage=9V, Min Operating Temperature=-40°C, Operating Supply Current=550uA, Output Current per Channel=65mA, Package Quantity=3000, Supplier Part Number 1=2920854, -3db Bandwidth=115MHz, Amplifier Type="GENERAL PURPOSE", ComponentLink1Description=http://www.micrel.com/_PDF/mic920.pdf?src-supplier=Future+Electronics, ComponentLink1URL=http://www.micrel.com/_PDF/mic920.pdf?src-supplier=Future+Electronics, Gain Bandwidth Product=80MHz, Input Offset Voltage-Max=300uV, Lead Free="Lead Free", Manufacturer Part Number=MIC920YC5-TR, Mount="Surface Mount", Number of Channels=1, Number of Circuits=1, Number of Pins=5, Packaging="Tape and Reel", Pricing 1="1=0.458, 25=0.397, 100=0.382, 3000=0.367 (EUR)", RoHS Compliant=Yes, Series=-, Slew Rate=3000V/µs, Slew Rate-Nom=3000V/µs, Stock 1=1311, Supplier 1=Farnell
R1 R2 R15 R16: library part "2.2kOhm resistor", "TE CONNECTIVITY - CRGCQ0603J2K2 - SMD Chip Resistor, 0603 [1608 Metric], 2.2 kohm, CRGCQ Series, 75 V, Thick Film, 100 mW - SMD Chip Resistor, 0603 [1608 Metric], 2.2 kohm, CRGCQ Series, 75 V, Thick Film, 100 mW", Manufacturer="TE Connectivity", Manufacturer Part Number=CRGCQ0603J2K2, Supplier Part Number 1=2861866, ComponentLink1Description=https://4donline.ihs.com/images/VipMasterIC/IC/TYEL/TYEL-S-A0004929575/TYEL-S-A0004929575-1.pdf?hkey=52A5661711E402568146F3353EA87419&src-supplier=Element14, ComponentLink1URL=https://4donline.ihs.com/images/VipMasterIC/IC/TYEL/TYEL-S-A0004929575/TYEL-S-A0004929575-1.pdf?hkey=52A5661711E402568146F3353EA87419&src-supplier=Element14, ComponentLink2Description=https://4donline.ihs.com/images/VipMasterIC/IC/TYEL/TYEL-S-A0004929575/TYEL-S-A0004929575-1.pdf?hkey=52A5661711E402568146F3353EA87419&src-supplier=Newark, ComponentLink2URL=https://4donline.ihs.com/images/VipMasterIC/IC/TYEL/TYEL-S-A0004929575/TYEL-S-A0004929575-1.pdf?hkey=52A5661711E402568146F3353EA87419&src-supplier=Newark, ComponentLink3Description=https://www.te.com/commerce/DocumentDelivery/DDEController?Action=srchrtrv&amp;DocNm=1773204-3&amp;DocType=DS&amp;DocLang=English&src-supplier=Digi-Key, ComponentLink3URL=https://www.te.com/commerce/DocumentDelivery/DDEController?Action=srchrtrv&amp;DocNm=1773204-3&amp;DocType=DS&amp;DocLang=English&src-supplier=Digi-Key, RoHS Compliant=Yes, Supplier 1=Farnell
R3 R4 R5 R6: library part "1kOhm resistor", "ROHM - ESR03EZPF1001 - SMD Chip Resistor, Anti-Surge, 0603 [1608 Metric], 1 kohm, ESR Series, 150 V, Thick Film, 250 mW", Case/Package=0603, Case Code (Metric)=1608, Manufacturer=Rohm, Manufacturer Part Number=ESR03EZPF1001, Max Operating Temperature=155°C, Max Power Dissipation=250mW, Min Operating Temperature=-55°C, Package Quantity=1, Resistance=1kR, Resistor Type="Thick Film", Supplier Part Number 1=2887143, Temperature Coefficient=100ppm/°C, Tolerance=1%, Case Code (Imperial)=0603, ComponentLink1Description=https://www.rohm.com/datasheet/ESR01MZPF/esr-e?src-supplier=Digi-Key, ComponentLink1URL=https://www.rohm.com/datasheet/ESR01MZPF/esr-e?src-supplier=Digi-Key, Features="Automotive AEC-Q200", Height=0.022inch, Lead Free="Lead Free", Length=0.063inch, Number of Terminations=2, Packaging="Tape and Reel", Power Rating=250mW, RoHS Compliant=Yes, Series=ESR, Size Code=0603, Supplier 1=Farnell, Width=0.031inch
R7 R8 R13 R18: library part "100kOhm resistor", "Res General Purpose Thick Film 0402 100k Ohm 1% 1/16W ±100ppm/°C Molded Paper T/R", Case/Package=0402, Case Code (Metric)=1005, Manufacturer="TE Connectivity", Manufacturer Part Number=CRGCQ0402F100K, Max Operating Temperature=155°C, Max Power Dissipation=63mW, Min Operating Temperature=-55°C, Resistance=100kR, Resistor Type="Thick Film", Supplier Part Number 1=3495222, Temperature Coefficient=100ppm/°C, Tolerance=1%, Case Code (Imperial)=0402, ComponentLink1Description=https://4donline.ihs.com/images/VipMasterIC/IC/TYEL/TYEL-S-A0004929575/TYEL-S-A0004929575-1.pdf?hkey=52A5661711E402568146F3353EA87419&src-supplier=Farnell, ComponentLink1URL=https://4donline.ihs.com/images/VipMasterIC/IC/TYEL/TYEL-S-A0004929575/TYEL-S-A0004929575-1.pdf?hkey=52A5661711E402568146F3353EA87419&src-supplier=Farnell, ComponentLink2Description=https://4donline.ihs.com/images/VipMasterIC/IC/TYEL/TYEL-S-A0004929575/TYEL-S-A0004929575-1.pdf?hkey=52A5661711E402568146F3353EA87419&src-supplier=Element14, ComponentLink2URL=https://4donline.ihs.com/images/VipMasterIC/IC/TYEL/TYEL-S-A0004929575/TYEL-S-A0004929575-1.pdf?hkey=52A5661711E402568146F3353EA87419&src-supplier=Element14, ComponentLink3Description=https://4donline.ihs.com/images/VipMasterIC/IC/TYEL/TYEL-S-A0004929575/TYEL-S-A0004929575-1.pdf?hkey=52A5661711E402568146F3353EA87419&src-supplier=Newark, ComponentLink3URL=https://4donline.ihs.com/images/VipMasterIC/IC/TYEL/TYEL-S-A0004929575/TYEL-S-A0004929575-1.pdf?hkey=52A5661711E402568146F3353EA87419&src-supplier=Newark, ComponentLink4Description=https://www.te.com/commerce/DocumentDelivery/DDEController?Action=srchrtrv&amp;DocNm=1773204-3&amp;DocType=DS&amp;DocLang=English&src-supplier=Digi-Key, ComponentLink4URL=https://www.te.com/commerce/DocumentDelivery/DDEController?Action=srchrtrv&amp;DocNm=1773204-3&amp;DocType=DS&amp;DocLang=English&src-supplier=Digi-Key, Features="Moisture Resistant,Automotive AEC-Q200", Number of Terminations=2, Packaging="Tape and Reel", RoHS Compliant=Yes, Supplier 1=Farnell
R12 R14 R17 R24 R25: library part "200kOhm resistor", "Res Thin Film 0603 200K Ohm 0.1% 1/10W ±25ppm/°C Molded SMD SMD Punched Carrier T/R", Case/Package=0603, Case Code (Metric)=1608, Manufacturer=Panasonic, Manufacturer Part Number=ERA-3AEB204V, Max Operating Temperature=155°C, Max Power Dissipation=100mW, Min Operating Temperature=-55°C, Package Quantity=5000, Resistance=200kR, Resistance Tolerance=0.1%, Resistor Type="Thin Film", Supplier Part Number 1=3495762, Temperature Coefficient=25ppm/°C, Voltage Rating=75V, Case Code (Imperial)=0603, ComponentLink1Description=https://www.distrelec.biz/Web/Downloads/_t/ds/ERA_eng_tds.pdf?mime=application%2Fpdf&src-supplier=Distrelec, ComponentLink1URL=https://www.distrelec.biz/Web/Downloads/_t/ds/ERA_eng_tds.pdf?mime=application%2Fpdf&src-supplier=Distrelec, ComponentLink2Description=http://www.farnell.com/datasheets/485442.pdf?src-supplier=Element14, ComponentLink2URL=http://www.farnell.com/datasheets/485442.pdf?src-supplier=Element14, ComponentLink3Description=http://www.farnell.com/datasheets/2059650.pdf?src-supplier=Farnell, ComponentLink3URL=http://www.farnell.com/datasheets/2059650.pdf?src-supplier=Farnell, ComponentLink4Description=http://www.farnell.com/datasheets/485442.pdf?src-supplier=Farnell, ComponentLink4URL=http://www.farnell.com/datasheets/485442.pdf?src-supplier=Farnell, ComponentLink5Description=http://www.farnell.com/datasheets/39837.pdf?src-supplier=Element14, ComponentLink5URL=http://www.farnell.com/datasheets/39837.pdf?src-supplier=Element14, ComponentLink6Description=https://www.alliedelec.com/m/d/b6b0537e86f421aa7f5975bb1d8f429a.pdf?src-supplier=Allied+Electronics, ComponentLink6URL=https://www.alliedelec.com/m/d/b6b0537e86f421aa7f5975bb1d8f429a.pdf?src-supplier=Allied+Electronics, ComponentLink7Description=http://industrial.panasonic.com/www-data/pdf/AOA0000/AOA0000CE26.pdf?src-supplier=Avnet, ComponentLink7URL=http://industrial.panasonic.com/www-data/pdf/AOA0000/AOA0000CE26.pdf?src-supplier=Avnet, ComponentLink8Description=http://www.produktinfo.conrad.com/datenblaetter/450000-474999/451764-da-01-en-WIDERSTAND_0603_ERA.pdf?src-supplier=Conrad, ComponentLink8URL=http://www.produktinfo.conrad.com/datenblaetter/450000-474999/451764-da-01-en-WIDERSTAND_0603_ERA.pdf?src-supplier=Conrad, Construction=Rectangular, Contact Plating=Tin, Depth=0.8mm, Features="Automotive AEC-Q200", Height=0.45mm, Lead Free="Lead Free", Length=1.6mm, Military Standard=Not, Mount="Surface Mount", Number of Pins=2, Number of Terminations=2, Packaging="Tape and Reel", Power Rating=100mW, Radiation Hardening=No, REACH SVHC="No SVHC", RoHS Compliant=Yes, Series=ERA-3A, Size Code=0603, Supplier 1=Farnell, Technology="THIN FILM", Termination=SMD/SMT, Tolerance=0.1%, Voltage Rating (DC)=75V, Width=0.8mm
R23: library part "50Ohm resistor", "Res, 50R, 1%, 0.063W, 0402 Rohs Compliant: Yes", Manufacturer="KOA Speer", Manufacturer Part Number=RN73R1ETTP50R0F50, Supplier Part Number 1=3544456, ComponentLink1Description=https://datasheet.octopart.com/RN73R1ETTP50R0F50-KOA-Speer-datasheet-149653819.pdf?src-supplier=Farnell, ComponentLink1URL=https://datasheet.octopart.com/RN73R1ETTP50R0F50-KOA-Speer-datasheet-149653819.pdf?src-supplier=Farnell, Supplier 1=Farnell
S1 S2 S3 S4: "SWITCH, SMD, 6.5X6X3.1MM, 0.5N", Actuator Color=White, Case/Package=SMD/SMT, Contact Current Rating=20mA, Contact Resistance=100mR, Manufacturer=Panasonic, Max Operating Temperature=85°C, Max Voltage Rating (AC)=250V, Max Voltage Rating (DC)=15V, Min Operating Temperature=-40°C, Operating Force=0.5N, Package Quantity=1, Supplier Part Number 1=2459497, Actuator Length=1.3mm, Actuator Type=Standard, Body Depth=6mm, Color=White, ComponentLink1Description=http://www.farnell.com/datasheets/578646.pdf?src-supplier=Element14, ComponentLink1URL=http://www.farnell.com/datasheets/578646.pdf?src-supplier=Element14, ComponentLink2Description=http://www.farnell.com/datasheets/2244072.pdf?src-supplier=Farnell, ComponentLink2URL=http://www.farnell.com/datasheets/2244072.pdf?src-supplier=Farnell, ComponentLink3Description=http://uk.rs-online.com/webdocs/10ad/0900766b810ad242.pdf?src-supplier=RSComponents, ComponentLink3URL=http://uk.rs-online.com/webdocs/10ad/0900766b810ad242.pdf?src-supplier=RSComponents, ComponentLink4Description=http://industrial.panasonic.com/www-data/pdf/ATK0000/ATK0000CE28.pdf?src-supplier=Avnet, ComponentLink4URL=http://industrial.panasonic.com/www-data/pdf/ATK0000/ATK0000CE28.pdf?src-supplier=Avnet, ComponentLink5Description=https://industrial.panasonic.com/cdbs/www-data/pdf/ATK0000/ATK0000CE28.pdf?src-supplier=Digi-Key, ComponentLink5URL=https://industrial.panasonic.com/cdbs/www-data/pdf/ATK0000/ATK0000CE28.pdf?src-supplier=Digi-Key, ComponentLink6Description=https://industrial.panasonic.com/ac/cdn/e/control/switch/light-touch/catalog/sw_lt_eng_6s_th.pdf?src-supplier=Digi-Key, ComponentLink6URL=https://industrial.panasonic.com/ac/cdn/e/control/switch/light-touch/catalog/sw_lt_eng_6s_th.pdf?src-supplier=Digi-Key, Contact Plating=Silver,Gold, Current Rating=20mA, Depth=6.6mm, Electrical Life=2000000Cycles, Height=3.1mm, Illumination Type=Non-Illuminated,Illuminated, Lead Free="Lead Free", Length=6mm, Manufacturer Part Number=EVQ-Q2D03W, Max Current Rating=20mA, Mechanical Life=2000000Cycles, Mount="Surface Mount", Orientation=Straight, Packaging="Tape and Reel", Pricing 1="2000=0.191 (EUR)", Radiation Hardening=No, REACH SVHC=Unknown, Series=EVQQ2, Size=1.8mm, Stock 1=0, Supplier 1=Farnell, Switch Function=Off-Mom, Switch Travel=0.2mm, Termination=SMD/SMT, Thickness=1.8mm, Throw Configuration=SPST, Voltage Rating (AC)=250V, Voltage Rating (DC)=15V
U1: "MICROCHIP - 24C02C/SN - SERIAL EEPROM, 2KBIT, 400KHZ, SOIC-8", Case/Package=SOIC, Frequency=400kHz, Manufacturer=Microchip, Max Operating Temperature=70°C, Max Supply Voltage=5.5V, Min Operating Temperature=0°C, Min Supply Voltage=4.5V, Nominal Supply Current=3mA, Operating Supply Voltage=5V, Package Quantity=100, Supplier Part Number 1=1607552, Access Time=900ns, Access Time-Max=900ns, ComponentLink1Description=http://www.farnell.com/datasheets/1688094.pdf?src-supplier=Element14, ComponentLink1URL=http://www.farnell.com/datasheets/1688094.pdf?src-supplier=Element14, ComponentLink2Description=http://ww1.microchip.com/downloads/en/DeviceDoc/21202d.pdf?src-supplier=Mouser, ComponentLink2URL=http://ww1.microchip.com/downloads/en/DeviceDoc/21202d.pdf?src-supplier=Mouser, ComponentLink3Description=https://www.alliedelec.com/m/d/de95da595ed0857ba5ed453637810f1b.pdf?src-supplier=Allied+Electronics, ComponentLink3URL=https://www.alliedelec.com/m/d/de95da595ed0857ba5ed453637810f1b.pdf?src-supplier=Allied+Electronics, Density=2Kb, Height=1.5mm, Interface=I2C,Serial,2-Wire, Lead Free="Lead Free", Length=4.9mm, Manufacturer Part Number=24C02C/SN, Max Frequency=400kHz, Memory Size=2Kb, Memory Type=EEPROM, Mount="Surface Mount", Number of Pins=8, Number of Words=256, Organization=256X8, Packaging=Rail/Tube, Pricing 1="1=0.423, 25=0.415, 100=0.406 (EUR)", Programming Voltage=5.5V, Radiation Hardening=No, REACH SVHC="No SVHC", RoHS Compliant=Yes, Stock 1=1100, Supplier 1=Farnell, Supply Current=3mA, Supply Voltage-Nom=5.5V, Width=3.9mm, Write Cycle Time-Max (tWC)=1.5ms, Write Protection=YES
U2: "MCU 32-Bit LPC5512 ARM Cortex-M33 RISC 64KB Flash 1.8V to 3.6V 100-Pin HLQFP Tray", Manufacturer="NXP Semiconductors", Supplier Part Number 1=3385148, Manufacturer Part Number=LPC5512JBD100E, Pricing 1="1=6.98, 10=4.28, 25=4.19, 50=4.11 (EUR)", RoHS Compliant=Yes, Stock 1=70, Supplier 1=Farnell
U3 U6: "NVT2006 Series Bidirectional Open Drain Voltage Level Translator - HVQFN-16", Manufacturer="NXP Semiconductors", Max Operating Temperature=85°C, Max Supply Voltage=5.5V, Min Operating Temperature=-40°C, Min Supply Voltage=1.8V, Operating Frequency-Max=33MHz, Package Quantity=6000, Supplier Part Number 1=2890115, ComponentLink1Description=http://www.nxp.com/documents/data_sheet/NVT2003_04_06.pdf?src-supplier=Digi-Key, ComponentLink1URL=http://www.nxp.com/documents/data_sheet/NVT2003_04_06.pdf?src-supplier=Digi-Key, ComponentLink2Description=https://www.nxp.com/docs/en/data-sheet/NVT2003_04_06.pdf?src-supplier=Digi-Key, ComponentLink2URL=https://www.nxp.com/docs/en/data-sheet/NVT2003_04_06.pdf?src-supplier=Digi-Key, ComponentLink3Description=http://ics.nxp.com/interface/to/documents/data_sheet/NVT2003_04_06.pdf?src-supplier=Avnet, ComponentLink3URL=http://ics.nxp.com/interface/to/documents/data_sheet/NVT2003_04_06.pdf?src-supplier=Avnet, Lead Free="Lead Free", Logic Function=Translator, Manufacturer Part Number=NVT2006BS,118, Number of Bits=6, Number of Channels=6, Number of Pins=16, Output Type=Voltage, Packaging="Tape and Reel", Pricing 1="1=0.47, 10=0.35, 100=0.336, 500=0.323, 1000=0.309, 2500=0.296, 5000=0.282 (EUR)", Propagation Delay=1.5ns, Radiation Hardening=No, RoHS Compliant=Yes, Series=-, Stock 1=6000, Supplier 1=Farnell